# Altium PCB Eurocircuit_6C.PcbDoc
Units mm, origin at the board's own origin, x right, y up, seen from the top; angles counter-clockwise.
Board outline 170 x 40 mm, 2 copper layers (Top Layer, Bottom Layer), stack 1.586 mm thick; 68 components, 57 nets, 228 pads, 6 vias.
Unrouted connection lines stored in the file: 85.
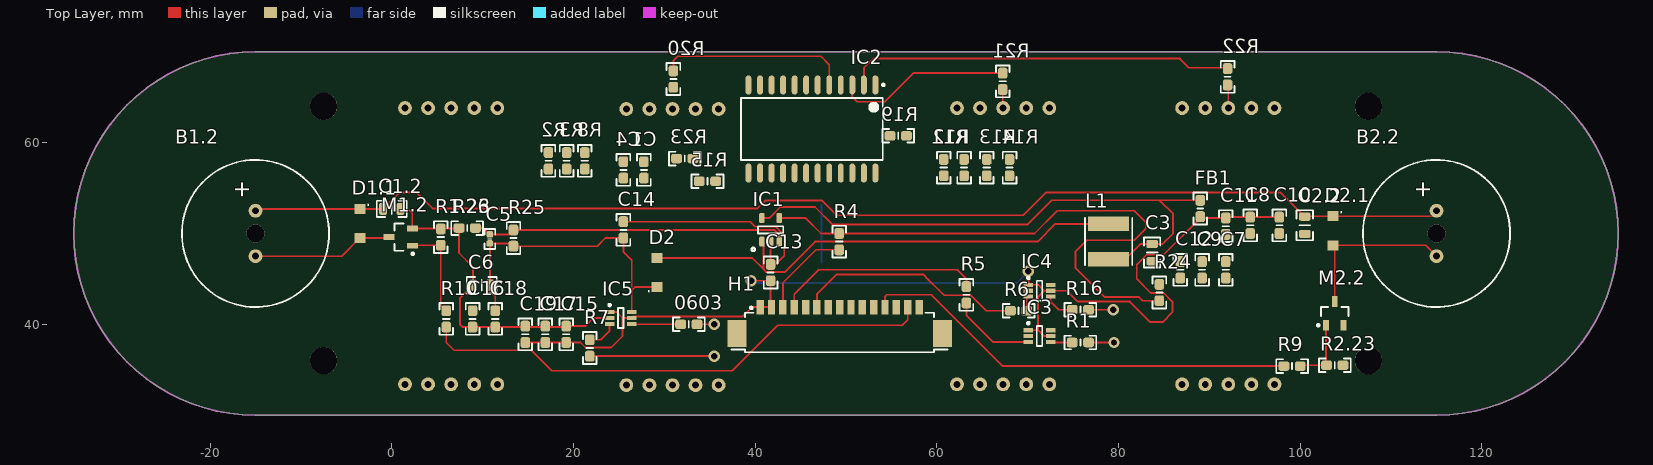
[diagram p0: Top Layer view]
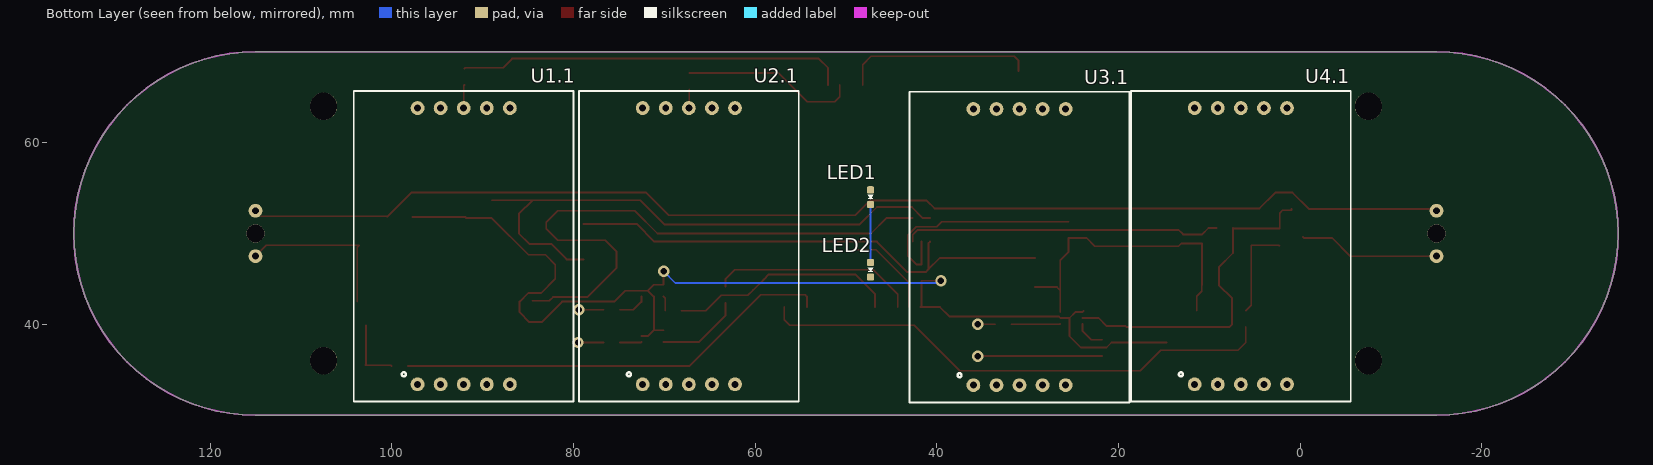
[diagram p1: Bottom Layer view, seen from below]

## Layer stack, top to bottom
Top Solder: solder mask 0.0102, Solder Resist, Dk 3.5
Top Layer: signal copper 0.018
Dielectric1: core 1.55, FR-4, Dk 4.8
Bottom Layer: signal copper 0.018
Bottom Solder: solder mask 0.0102, Solder Resist, Dk 3.5

## Board outline
-15,30 115,30 116.427,30.051 117.846,30.204 119.251,30.457 120.635,30.81 121.989,31.261 123.308,31.807 124.585,32.446 125.813,33.175 126.986,33.989 128.097,34.885 129.142,35.858 130.115,36.903 131.011,38.014 131.825,39.187 132.554,40.415 133.193,41.692 133.739,43.011 134.19,44.365 134.543,45.749 134.796,47.154 134.949,48.573 135,50 134.949,51.427 134.796,52.846 134.543,54.251 134.19,55.635 133.739,56.989 133.193,58.308 132.554,59.585 131.825,60.813 131.011,61.986 130.115,63.097 129.142,64.142 128.097,65.115 126.986,66.011 125.813,66.825 124.585,67.554 123.308,68.193 121.989,68.739 120.635,69.19 119.251,69.543 117.846,69.796 116.427,69.949 115,70 -15,70 -16.427,69.949 -17.846,69.796 -19.251,69.543 -20.635,69.19 -21.989,68.739 -23.308,68.193 -24.585,67.554 -25.813,66.825 -26.986,66.011 -28.097,65.115 -29.142,64.142 -30.115,63.097 -31.011,61.986 -31.825,60.813 -32.554,59.585 -33.193,58.308 -33.739,56.989 -34.19,55.635 -34.543,54.251 -34.796,52.846 -34.949,51.427 -35,50 -34.949,48.573 -34.796,47.154 -34.543,45.749 -34.19,44.365 -33.739,43.011 -33.193,41.692 -32.554,40.415 -31.825,39.187 -31.011,38.014 -30.115,36.903 -29.142,35.858 -28.097,34.885 -26.986,33.989 -25.813,33.175 -24.585,32.446 -23.308,31.807 -21.989,31.261 -20.635,30.81 -19.251,30.457 -17.846,30.204 -16.427,30.051

## Design rules (kind name [scope] priority, off if disabled: settings)
Clearance Clearance-xPP-xTP-xTT [All] p1: gap=0.15
ComponentClearance [All] p1: gap=0.25 collisioncheckmode=3 verticalgap=0.25 showdistances=FALSE
DiffPairsRouting [All] p1: maxlimit=0.25 minlimit=0.25 mostfreqgap=0.25 toplayer_minwidth=0.381 toplayer_maxwidth=0.381 toplayer_prefwidth=0.381 bottomlayer_minwidth=0.381 bottomlayer_maxwidth=0.381 bottomlayer_prefwidth=0.381 maxuncoupledlength=12.5
Height [All] p1: minheight=0 maxheight=25 prefheight=12.5
HoleSize HoleSize-PTH [All] p1: absolutevalues=TRUE maxlimit=2 minlimit=0.25 maxpercent=80.000 minpercent=20.000
HoleToHoleClearance [All] p1: gap=0.35 allowstackedmicrovias=TRUE
MinimumAnnularRing "Minimum IAR  >0.45mm" [((ObjectKind = 'Pad') OR (ObjectKind = 'Via')) And (Layer = 'MultiLayer') And (HoleDiameter > AsMM(0.45))] p1: minimumring=0.175 // minimum inner annular ring for pads > 0.45mm finished hole size
MinimumAnnularRing "Minimum IAR <=0.45mm" [((ObjectKind = 'Pad') OR (ObjectKind = 'Via')) And (Layer = 'MultiLayer') And (HoleDiameter <= AsMM(0.45))] p2: minimumring=0.175 // minimum inner annular ring for pads <= 0.45mm finished hole size
MinimumSolderMaskSliver [All] p1: minsoldermaskwidth=0.08
PlaneClearance PlaneClearance-IPI [All] p1: clearance=0.25
PlaneConnect [All] p1: planeconnectstyle=Relief reliefexpansion=0.175 reliefentries=4 reliefconductorwidth=0.2 reliefairgap=0.2
PolygonConnect PolygonConnect-xTW [All] p1: connectstyle=Relief reliefconductorwidth=0.2 reliefentries=4 polygonreliefangle="90 Angle" airgapwidth=0.2
RoutingCorners [All] p1: cornerstyle=45-Degree minsetback=2.5 maxsetback=2.5
RoutingVias "RoutingVias > 0.45mm" [(ObjectKind = 'Via') And (HoleDiameter > AsMM(0.45))] p1: holewidth=0.5 width=0.85 viastyle="Through Hole" minholewidth=0.5 minwidth=0.85 maxholewidth=0.9 maxwidth=1.25 // finishet hole size > 0.45mm
RoutingVias "RoutingVias <= 0.45mm" [(ObjectKind = 'Via') And (HoleDiameter <= AsMM(0.45))] p2: holewidth=0.3 width=0.65 viastyle="Through Hole" minholewidth=0.25 minwidth=0.6 maxholewidth=0.45 maxwidth=0.8 // finishet hole size <= 0.45mm
SilkToSilkClearance [All] p1: silktosilkclearance=0.2
SilkToSolderMaskClearance SilkscreenOverComponentPads [IsPad] p1: minsilkscreentomaskgap=0.2 clearancetoexposedcopper=TRUE
SolderMaskExpansion [All] p1: expansion=0
Width Width-xTW [All] p1: maxlimit=1.5 minlimit=0.15 preferedwidth=0.2
18 further rules are at their usual default settings.

## Classes and differential pairs
channel class TP_IHM_BUZZER: BUZZER_LEFT BUZZER_RIGHT
channel class TP_IHM_7SEG: 7SEG_A 7SEG_B 7SEG_C 7SEG_D
component class U_TP_IHM_7SEG_DRIVERS: C1 C4 IC2 R2 R3 R8 R11 R12 R13 R14 R15 R19 R20 R21 R22 R23
component class TP_IHM_MAIN: LED1 LED2
component class POWER: C3 C5 C6 D2 FB1 IC1 L1 R24 R25 R26
component class CONNECTOR: 0603 C7 C8 C9 C10 C11 C12 C13 C14 C15 C16 C17 C18 C19 H1 IC3 IC4 IC5 R1 R4 R5 R6 R7 R9 R10 R16
component class BUZZER_RIGHT: B2.2 C2.2 D2.1 M2.2 R2.23
component class BUZZER_LEFT: B1.2 C1.2 D1.1 M1.2 R1.23
component class 7SEG_D: U4.1
component class 7SEG_C: U3.1
component class 7SEG_B: U2.1
component class 7SEG_A: U1.1

## Components (designator, comment, footprint, x,y, rotation, side; value= is the part's Value field where it differs from the comment)
0603 "Resistor" 0603_RES_LD 32.7,40 r0 top
B1.2 "Buzzer" SD160709 -15,50 r90 top (schematic designator B2)
B2.2 "Buzzer" SD160709 115,50 r90 top (schematic designator B2)
C1 "CerCap" 0603_CAP_LD 27.75,57 r90 top
C1.2 "CerCap" 0805_CAP_LD 0,52.7 r0 top (schematic designator C2)
C2.2 "CerCap" 0805_CAP_LD 100.5,50.9 r270 top (schematic designator C2)
C3 "CerCap" 0805_CAP_LD 83.7,47.9 r270 top
C4 "CerCap" 0603_CAP_LD 25.5,57 r270 top
C5 "CerCap" 0402_CAP_LD 10.8,49.4 r90 top
C6 "CerCap" 0805_CAP_LD 9.9,44.3 r180 top
C7 "CerCap" 0603_CAP_LD 91.8,46 r270 top
C8 "CerCap" 0603_CAP_LD 94.5,50.9 r270 top
C9 "CerCap" 0603_CAP_LD 89.2,46 r90 top
C10 "CerCap" 0603_CAP_LD 97.7,50.9 r270 top
C11 "CerCap" 0603_CAP_LD 91.8,50.8 r90 top
C12 "CerCap" 0603_CAP_LD 86.8,46 r270 top
C13 "CerCap" 0603_CAP_LD 41.7,45.7 r90 top
C14 "CerCap" 0603_CAP_LD 25.5,50.4 r90 top
C15 "CerCap" 0603_CAP_LD 19.2,38.9 r270 top
C16 "CerCap" 0603_CAP_LD 8.9,40.6 r90 top
C17 "CerCap" 0603_CAP_LD 16.9,38.9 r90 top
C18 "CerCap" 0603_CAP_LD 11.4,40.6 r270 top
C19 "CerCap" 0603_CAP_LD 14.7,38.9 r270 top
D1.1 "PMEG3010ER" SOD123W -3.5,51.1 r270 top (schematic designator D1)
D2 "PMEG3010ER" SOD123W 29.2,45.7 r90 top
D2.1 "PMEG3010ER" SOD123W 103.6,50.3 r270 top (schematic designator D1)
FB1 "Ferrite" 0603_FER_LD 89,52.75 r270 top
H1 "Header" 653115131822 49.3,39.1 r0 top
IC1 "Step up Regulator" LMR62421 41.7,50.4 r90 top
IC2 "8 Digits Driver" MAX7221CWG 46.25,61.5 r270 top
IC3 "SN74LVC1T45" MO-203AB_LD 71.3,38.7 r0 top
IC4 "SN74LVC1T45" MO-203AB_LD 71.3,43.7 r0 top
IC5 "SN74LVC1T45" MO-203AB_LD 25.2,40.7 r0 top
L1 "10uH, 1.6A" INDUCTOR_WE-LQS_5020 78.9,49.1 r90 top
LED1 "RED Led" LED_0603_RED 47.3,54 r90 bottom
LED2 "RED Led" LED_0603_RED 47.3,46 r90 bottom
M1.2 "NMOS" MOSFET-SOT23 1,49.6 r180 top (schematic designator M2)
M2.2 "NMOS" MOSFET-SOT23 103.8,41.2 r90 top (schematic designator M2)
R1 "Resistor" 0603_RES_LD 75.8,38 r0 top
R1.23 "Resistor" 0603_RES_LD 5.4,49.6 r270 top (schematic designator R23)
R2 "Resistor" 0603_RES_LD 17.25,58 r270 top
R2.23 "Resistor" 0603_RES_LD 103.8,35.5 r180 top (schematic designator R23)
R3 "Resistor" 0603_RES_LD 19.25,58 r270 top
R4 "Resistor" 0603_RES_LD 49.25,49.1 r90 top
R5 "Resistor" 0603_RES_LD 63.25,43.25 r270 top
R6 "Resistor" 0603_RES_LD 69,41.5 r0 top
R7 "Resistor" 0603_RES_LD 21.8,37.4 r90 top
R8 "Resistor" 0603_RES_LD 21.25,58 r270 top
R9 "Resistor" 0603_RES_LD 99.1,35.4 r0 top
R10 "Resistor" 0603_RES_LD 6,40.6 r90 top
R11 "Resistor" 0603_RES_LD 60.75,57.25 r270 top
R12 "Resistor" 0603_RES_LD 63,57.25 r270 top
R13 "Resistor" 0603_RES_LD 65.5,57.25 r270 top
R14 "Resistor" 0603_RES_LD 68,57.25 r270 top
R15 "Resistor" 0603_RES_LD 34.75,55.75 r0 top
R16 "Resistor" 0603_RES_LD 75.8,41.6 r0 top
R19 "Resistor" 0603_RES_LD 55.75,60.75 r180 top
R20 "Resistor" 0603_RES_LD 31,67 r90 top
R21 "Resistor" 0603_RES_LD 67.25,66.75 r90 top
R22 "Resistor" 0603_RES_LD 92,67.25 r90 top
R23 "Resistor" 0603_RES_LD 32.25,58.25 r180 top
R24 "Resistor" 0603_RES_LD 84.5,43.5 r90 top
R25 "Resistor" 0603_RES_LD 13.4,49.5 r270 top
R26 "Resistor" 0603_RES_LD 8.3,50.6 r0 top
U1.1 "7 Segments" SA10-21GWA 92.08,48.6 r180 bottom (schematic designator U1)
U2.1 "7 Segments" SA10-21GWA 67.3,48.6 r180 bottom (schematic designator U1)
U3.1 "7 Segments" SA10-21GWA 30.9,48.5 r180 bottom (schematic designator U1)
U4.1 "7 Segments" SA10-21GWA 6.54,48.6 r180 bottom (schematic designator U1)

## Footprints (in the part's own frame and the unit in brackets; to place one, negate y for a bottom-side part, rotate by r counter-clockwise, add the part's x,y. Pads: shape width x height; smd on the part's side, far side on the other; paste and mask are expansions set on the pad)
0402_CAP_LD [mm] "0402 Capacitor low Density"
  rrect50% 0.72x0.72 smd: 1(-0.5,0) 2(0.5,0)
  silkscreen extent -1.1,-0.6 1.1,0.6, body extent -0.52,-0.27 0.53,0.28, height 0.55
0603_CAP_LD [mm] "0603 Capacitor Low Density"
  rrect50% 1.2x1.05 smd: 1(-0.9,0) 2(0.9,0)
  silkscreen extent -1.75,-0.75 1.75,0.75, body extent -0.85,-0.45 0.85,0.45, height 0.55
0603_FER_LD [mm] "0603 Ferrite Bead Low Density"
  rrect50% 1.2x1.05 smd: 1(-0.9,0) 2(0.9,0)
  silkscreen extent -1.75,-0.75 1.75,0.75, body extent -0.8,-0.4 0.8,0.4, height 0.78
0603_RES_LD [mm] "0603 Resistor Low Density"
  rrect50% 1.2x1.05 smd: 1(-0.9,0) 2(0.9,0)
  silkscreen extent -1.75,-0.75 1.75,0.75, body extent -0.85,-0.45 0.85,0.45, height 0.55
0805_CAP_LD [mm] "0805 Capacitor low Density"
  rrect50% 0.9x1.3 smd: 1(-0.95,0) 2(0.95,0)
  silkscreen extent -1.65,-0.9 1.65,0.9, body extent -1.05,-0.67 1.05,0.68, height 0.95
653115131822 [mm] "1.25mm SMT Male Horizontal Shrouded Header, 15p"
  rect 0.81x1.6 smd: 1(-8.75,2.8) 2(-7.5,2.8) 3(-6.25,2.8) 4(-5,2.8) 5(-3.75,2.8) 6(-2.5,2.8) 7(-1.25,2.8) 8(0,2.8) 9(1.25,2.8) 10(2.5,2.8) 11(3.75,2.8) 12(5,2.8) 13(6.25,2.8) 14(7.5,2.8) 15(8.75,2.8)
  rect 2.1x3 smd: ""(-11.3,-0.1) ""(11.3,-0.1)
  silkscreen extent -11.9,-2.17 11.9,2.82, body extent -11.75,-2.1 11.75,3.3, height 3.4
INDUCTOR_WE-LQS_5020 [mm] "SMD Power Inductor, 2-Leads, body 5x5mm"
  rect 1.6x4.5 smd: 1(-1.95,0) 2(1.95,0)
  silkscreen extent -2.6,-2.6 2.6,2.6, body extent -2.5,-2.5 2.5,2.5, height 2
LED_0603_RED [mm] "SMD LED 0603"
  rrect50% 0.8x0.8 smd: 1(-0.8,0) 2(0.8,0)
  silkscreen extent -0.23,-0.3 0.25,0.3, body extent -0.8,-0.4 0.8,0.4, height 0.59
LMR62421 [mm] "LMR62421 Texas SOT-23"
  rrect50% 1.1x0.6 smd: 1(-1.3,0.95) 2(-1.3,0) 3(-1.3,-0.95) 4(1.3,-0.95) 5(1.3,0.95)
  silkscreen extent -2.34,-1.4 0.4,2.08, body extent -1.42,-1.5 1.42,1.5, height 1.2
MAX7221CWG [mm] "MAX7221CWG SOIC 24"
  oval 2.1x0.65 smd: 1(-4.85,6.985) 2(-4.85,5.715) 3(-4.85,4.445) 4(-4.85,3.175) 5(-4.85,1.905) 6(-4.85,0.635) 7(-4.85,-0.635) 8(-4.85,-1.905) 9(-4.85,-3.175) 10(-4.85,-4.445) 11(-4.85,-5.715) 12(-4.85,-6.985) 13(4.85,-6.985) 14(4.85,-5.715) 15(4.85,-4.445) 16(4.85,-3.175) 17(4.85,-1.905) 18(4.85,-0.635) 19(4.85,0.635) 20(4.85,1.905) 21(4.85,3.175) 22(4.85,4.445) 23(4.85,5.715) 24(4.85,6.985)
  silkscreen extent -4.97,-7.8 3.4,7.99, body extent -5.16,-7.8 5.16,7.8, height 2.65
MO-203AB_LD [mm] "MO-203AB Low Density SOT23 6 Leads"
  rect 1.05x0.45 smd: 1(-1.225,0.65) 2(-1.225,0) 3(-1.225,-0.65) 4(1.225,-0.65) 5(1.225,0) 6(1.225,0.65)
  silkscreen extent -1.35,-1.1 0.3,1.55, body extent -1.2,-1.07 1.2,1.07, height 1.1
MOSFET-SOT23 [mm] "MOSFET SOT23 Package"
  rect 1.2x0.65 smd: D(1.3,0) G(-1.3,0.95) S(-1.3,-0.95)
  silkscreen extent -1.43,-1.5 0.7,1.95, body extent -1.42,-1.5 1.42,1.5, height 1.2
SA10-21GWA [mil] "KingBright 7 Segment SA10-21GWA"
  round 60 hole 30: 1(-200,-598.43) 2(-100,-598.43) 3(0,-598.43) 4(100,-598.43) 5(200,-598.43) 6(200,598.43) 7(100,598.43) 8(0,598.43) 9(-100,598.43) 10(-200,598.43)
  silkscreen extent -476,-673 476,673, body extent -472,-669 472,669, height 414
SD160709 [mil] "TDK SD160709 Buzzer"
  round 60 hole 30: +(98.43,0) -(-98.43,0)
  silkscreen extent -319,-319 319,319, body extent -315,-315 315,315, height 278
SOD123W [mm] "SOD123W Nexperia Low density"
  rect 1.1x1.2 smd: A(1.6,0) K(-1.6,0)
  silkscreen extent -2.1,0.85 -2,0.95, body extent -1.75,-0.95 1.75,0.95, height 1.1

## Part data
B1.2 B2.2: library part SD160709, "TDK SD160709 Buzzer"
C1 C1.2 C2.2 C3 C4 C5 C6 C7 C8 C9 C10 C11 C12 C13 C14 C15 C16 C17 C18 C19: "Ceramic Capacitor"
D1.1 D2 D2.1: library part Schottky_PMEG3010ER, "Nexperia 1A low Vf Mega Schottky barrier rectifier"
FB1: "Ferrite Bead"
H1: library part HEADER_15x1, "Header 15x1"
IC1: library part LMR62421XMF, "LMR62421 simple switcher 24 Vout stepup voltage SOT-23"
IC2: library part MAX7221, "MAX7221 8 Digit 7 Segments Display"
IC3 IC4 IC5: "Single Bit Dual Supply Buffer"
L1: library part INDUCTOR_74404052100, "WE-LQS SMD Power Inductor, size 5020, 10uH, 1.6A"
LED1 LED2: library part LED_RED_SMD_WE_150060RS750x0, "LED RED SMD WE 150060RS750x0"
M1.2 M2.2: library part N-MOSFET, "N MOSFET"
U1.1 U2.1 U3.1 U4.1: library part SC10-21SRWA, "KingBright Led 7 Segments"

## Free pads (board coordinates)
  round 2 hole 2 unplated: 1(-15,50) 1(115,50)
  round 3 hole 3 unplated: 1(-7.5,36) 1(-7.5,64) 1(107.5,36) 1(107.5,64)

## Via types
v1: diameter 1.25, hole 0.711, Top Layer to Bottom Layer, 6 vias

## Nets (pads, with @x,y where several pads share a name; then routed paths per layer and width w, separated by ;. In a path a pad name is that pad's centre, name@x,y a point inside that pad or via, vN(x,y) a via of type N, cw(c..) or ccw(c..) an arc to the next point about the centre after c; other vN are vias at no path point)
5V: C1.1 C4.2 C5.1 C6.1 C7.2 C9.1 C12.2 C14.1 C16.2 C18.1 D2.K IC2.19 IC3.6 IC4.6 IC5.6 R15.1 R25.2 | length 34.3
  Top Layer w0.2: C18.1 11.4,43.1 10.85,43.65 C6.1 10.8,44.35 C5.1 13.1,48.9 R25.2 22.6,48.6 23.5,49.5 C14.1 25.5,48 26.425,47.075 26.425,43.75 ; IC5.6 26.425,43.75 ; D2.K 26.775,44.1 26.425,43.75
ENABLESEG1: R22.1 U1.1.3 U1.1.8 | length 2.6
  Top Layer w0.2: R22.1 92.08,66.27 U1.1.8
ENABLESEG2: R21.1 U2.1.3 U2.1.8 | length 2.1
  Top Layer w0.2: R21.1 67.25,63.85 U2.1.8
ENABLESEG3: R20.1 U3.1.3 U3.1.8
ENABLESEG4: LED2.1 R19.1 U4.1.3 U4.1.8
GND: C1.2 C1.2.2 C2.2.2 C3.2 C4.1 C6.2 C7.1 C8.2 C9.2 C10.2 C11.1 C12.1 C13.2 C14.2 C15.1 C16.1 C17.2 C18.2 C19.1 H1.5 H1.7 H1.9 H1.10 H1.11 H1.13 H1.15 IC1.2 IC2.4 IC2.9 IC3.2 IC4.2 IC5.2 M1.2.S M2.2.S R1.23.1 R2.23.1 R24.2 R26.1 | length 62.2
  Top Layer w0.2: C1.2.2 0.95,52.55 1.95,52.55 2.25,52.25 2.25,50.6 M1.2.S 7.35,50.55 R26.1 7.4,47.85 8.95,46.3 C6.2 7.5,42.85 7.5,40 7.8,39.7 C16.1 19.1,39.7 C15.1 21.3,39.8 22.2,40.7 IC5.2 ; C14.2 39.45,51.3 40,50.75 42.245,50.75 43.2,49.795 43.2,47.55 42.25,46.6 C13.2 IC1.2
Net0603_1: 0603.1 IC5.4 | length 5.4
  Top Layer w0.2: IC5.4 26.475,40 0603.1
NetB1.2_-: B1.2.- D1.1.A M1.2.D | length 15.6
  Top Layer w0.2: B1.2.- -5.5,47.5 D1.1.A -0.4,49.5 M1.2.D
NetB2.2_-: B2.2.- D2.1.A M2.2.D | length 18.2
  Top Layer w0.2: M2.2.D 103.8,48.5 D2.1.A 113.8,48.7 B2.2.-
NetC3_1: C3.1 FB1.1 IC1.5 L1.1 | length 63.2
  Top Layer w0.2: IC1.5 41.534,51.7 42.75,52.916 46.584,52.916 48.5,51 70,51 72.666,53.666 83.084,53.666 83.1,53.65 84.5,53.65 ; L1.1 80.75,47.15 82.45,48.85 C3.1 84.85,48.85 86,50 86,52.15 84.5,53.65 ; FB1.1 84.5,53.65
NetC5_2: C5.2 IC1.3 R25.1 R26.2 | length 34.9
  Top Layer w0.2: R26.2 10.1,50.6 C5.2 12.9,49.9 R25.1 42.1,50.4 42.65,49.85 IC1.3
NetD2_A: D2.A IC1.1 L1.2 | length 55.7
  Top Layer w0.2: D2.A 39.675,47.3 40.925,46.05 ; IC1.1 40.925,48.925 40.925,46.05 ; L1.2 73.05,51.05 71.1,49.1 46.595,49.1 43.245,45.75 41.225,45.75 40.925,46.05
NetH1_3: H1.3 R4.1 | length 10.4
  Top Layer w0.2: H1.3 43.05,44.55 46.7,48.2 R4.1
NetH1_4: H1.4 R5.1 | length 22.7
  Top Layer w0.2: H1.4 44.3,43.3 47,46 62.25,46 63.25,45 R5.1
NetH1_6: H1.6 R6.1 | length 25.3
  Top Layer w0.2: H1.6 46.8,43.3 49,45.5 58.5,45.5 59.075,44.925 60.225,43.775 60.8,43.2 63.725,43.2 65.425,41.5 R6.1
NetH1_8: H1.8 R7.1 | length 13.7
  Top Layer w0.2: R7.1 v1(35.5,36.5)
NetH1_12: H1.12 R9.1 | length 48.4
  Top Layer w0.2: H1.12 54.3,43.05 54.5,43.25 59.4,43.25 67.25,35.4 R9.1
NetH1_14: H1.14 R10.1 | length 57.5
  Top Layer w0.2: R10.1 6,38 6.85,37.15 15.35,37.15 17.6,34.9 37.5,34.9 42.5,39.9 56.2,39.9 56.8,40.5 H1.14
NetIC2_2: IC2.2 R22.2 | length 42.8
  Top Layer w0.2: IC2.2 51.965,68.215 53,69.25 86.75,69.25 87.75,68.25 91.9,68.25 R22.2
NetIC2_3: IC2.3 R21.2 | length 19.4
  Top Layer w0.2: IC2.3 50.695,65.055 51.25,64.5 54.25,64.5 57.4,67.65 R21.2
NetIC2_5: IC2.5 R20.2 | length 21.1
  Top Layer w0.2: R20.2 31,69 31.5,69.5 47.25,69.5 48.155,68.595 IC2.5
NetIC2_6: IC2.6 R19.2
NetIC2_14: IC2.14 R14.2
NetIC2_15: IC2.15 R13.2
NetIC2_16: IC2.16 R12.2
NetIC2_17: IC2.17 R11.2
NetIC2_18: IC2.18 R15.2
NetIC2_20: IC2.20 R8.2
NetIC2_21: IC2.21 R3.2
NetIC2_22: IC2.22 R2.2
NetIC2_23: IC2.23 R23.2
NetIC3_3: IC3.3 R5.2 | length 9.4
  Top Layer w0.2: R5.2 63.25,41 66.2,38.05 IC3.3
NetIC3_4: IC3.4 R1.1 | length 2.4
  Top Layer w0.2: IC3.4 72.575,38 R1.1
NetIC4_3: IC4.3 R6.2 | length 1.6
  Top Layer w0.2: R6.2 69.9,42.875 IC4.3
NetIC4_4: IC4.4 R16.1 | length 3.3
  Top Layer w0.2: IC4.4 72.525,42.475 73.4,41.6 R16.1
NetIC5_3: IC5.3 R7.2 | length 3.4
  Top Layer w0.2: R7.2 23,38.3 23.975,39.275 IC5.3
NetLED1_1: LED1.1 LED2.2 | length 6.4
  Bottom Layer w0.2: LED2.2 LED1.1
NetLED1_2: LED1.2 R23.1
NetU1.1_5: U1.1.5
NetU2.1_5: U2.1.5
NetU3.1_5: U3.1.5
NetU4.1_5: U4.1.5
PWM_LEFT: M1.2.G R1.23.2 R10.2 | length 10.6
  Top Layer w0.2: M1.2.G 2.35,48.7 R1.23.2 5.4,42.1 R10.2
PWM_RIGHT: M2.2.G R2.23.2 R9.2 | length 7.4
  Top Layer w0.2: R9.2 100.1,35.5 R2.23.2 102.85,35.55 M2.2.G
PWR_EN: IC1.4 R4.2 R24.1 | length 64.7
  Top Layer w0.2: IC1.4 45.55,51.7 47.25,50 R4.2 70.75,50 73.25,52.5 81.75,52.5 83,51.25 83,50.5 81.75,49.25 76.5,49.25 75.25,48 75.25,46.25 78.5,43 82.25,43 82.65,42.6 R24.1
SEG_A: R14.1 U1.1.7 U2.1.7 U3.1.7 U4.1.7
SEG_B: R13.1 U1.1.6 U2.1.6 U3.1.6 U4.1.6
SEG_C: R12.1 U1.1.4 U2.1.4 U3.1.4 U4.1.4
SEG_D: R11.1 U1.1.2 U2.1.2 U3.1.2 U4.1.2
SEG_E: R8.1 U1.1.1 U2.1.1 U3.1.1 U4.1.1
SEG_F: R3.1 U1.1.9 U2.1.9 U3.1.9 U4.1.9
SEG_G: R2.1 U1.1.10 U2.1.10 U3.1.10 U4.1.10
SPI_CS: 0603.2 IC2.1 | length 1.9
  Top Layer w0.2: 0603.2 v1(35.5,40)
SPI_DIN: IC2.12 R1.2 | length 2.8
  Top Layer w0.2: R1.2 v1(79.5,38)
SPI_SCK: IC2.13 R16.2 | length 2.7
  Top Layer w0.2: R16.2 v1(79.4,41.6)
VBAT: C8.1 C10.1 C11.2 C13.1 C15.2 C17.1 C19.2 FB1.2 H1.1 H1.2 IC3.1 IC3.5 IC4.1 IC4.5 IC5.1 IC5.5 | length 120.9
  Top Layer w0.2: C19.2 C15.2 20.775,38 21.325,37.45 24.15,37.45 25.4,38.7 25.4,40.7 ; IC5.1@23.825,41.5 IC5.1 24.75,41.35 25.4,40.7 ; v1(39.55,44.8) C13.1 41.7,42 H1.2 H1.1 39.65,41.9 38.625,40.875 26.6,40.875 IC5.5 25.4,40.7 ; IC3.1 71.15,39.35 ; v1(70.075,45.825) IC4.1 71.15,44.35 71.8,43.7 ; IC3.5 71.8,38.7 71.15,39.35 ; C10.1 C8.1 91.9,51.8 C11.2 89,51.7 84.95,47.65 83.078,47.65 82,46.572 82,45 83.55,43.45 84.975,43.45 85.925,42.5 85.925,41.325 84.85,40.25 83.5,40.25 81.25,42.5 75.5,42.5 74.3,43.7 IC4.5 71.8,43.7 ; 71.15,39.35 71.15,43.05 71.8,43.7
  Bottom Layer w0.2: v1(39.55,44.8) 39.8,44.55 47.05,44.55 61.55,44.55 68.8,44.55 v1(70.075,45.825)
VBATT: B1.2.+ B2.2.+ C1.2.1 C2.2.1 D1.1.K D2.1.K | length 134.1
  Top Layer w0.2: B1.2.+ -14.8,52.7 D1.1.K C1.2.1 0.85,54.5 2.75,54.5 4.5,52.75 40.25,52.75 41.125,53.625 47.375,53.625 49,52 69.5,52 72,54.5 97.85,54.5 C2.2.1 100.55,51.9 D2.1.K 114.4,51.9
pads on no net: H1. IC2.7 IC2.8 IC2.10 IC2.11 IC2.24

## Keep-outs
Keep-Out Layer:
  the board outline again, w0.2

## Silkscreen, mask and mechanical layers (free items; w line width, h text height)
Mechanical 1:
  the board outline again, w0.2
  text ".Pcb_File_Name_No_Path" at 0,-2.5 h1.52

## Text inside footprints (layer, text, board x,y; h text height)
B1.2: Top Overlay "+" at -15.1,53.8 h3 r90
B2.2: Top Overlay "+" at 114.9,53.8 h3 r90